# Altium PCB Follow Line Robot Controller PCB.PcbDoc
Units mil, origin at the board's own origin, x right, y up, seen from the top; angles counter-clockwise.
Board outline 4205 x 4745 mil, 2 copper layers (Top Layer, Bottom Layer); 17 components, 25 nets, 107 pads, 4 vias.
Unrouted connection lines stored in the file: 1.
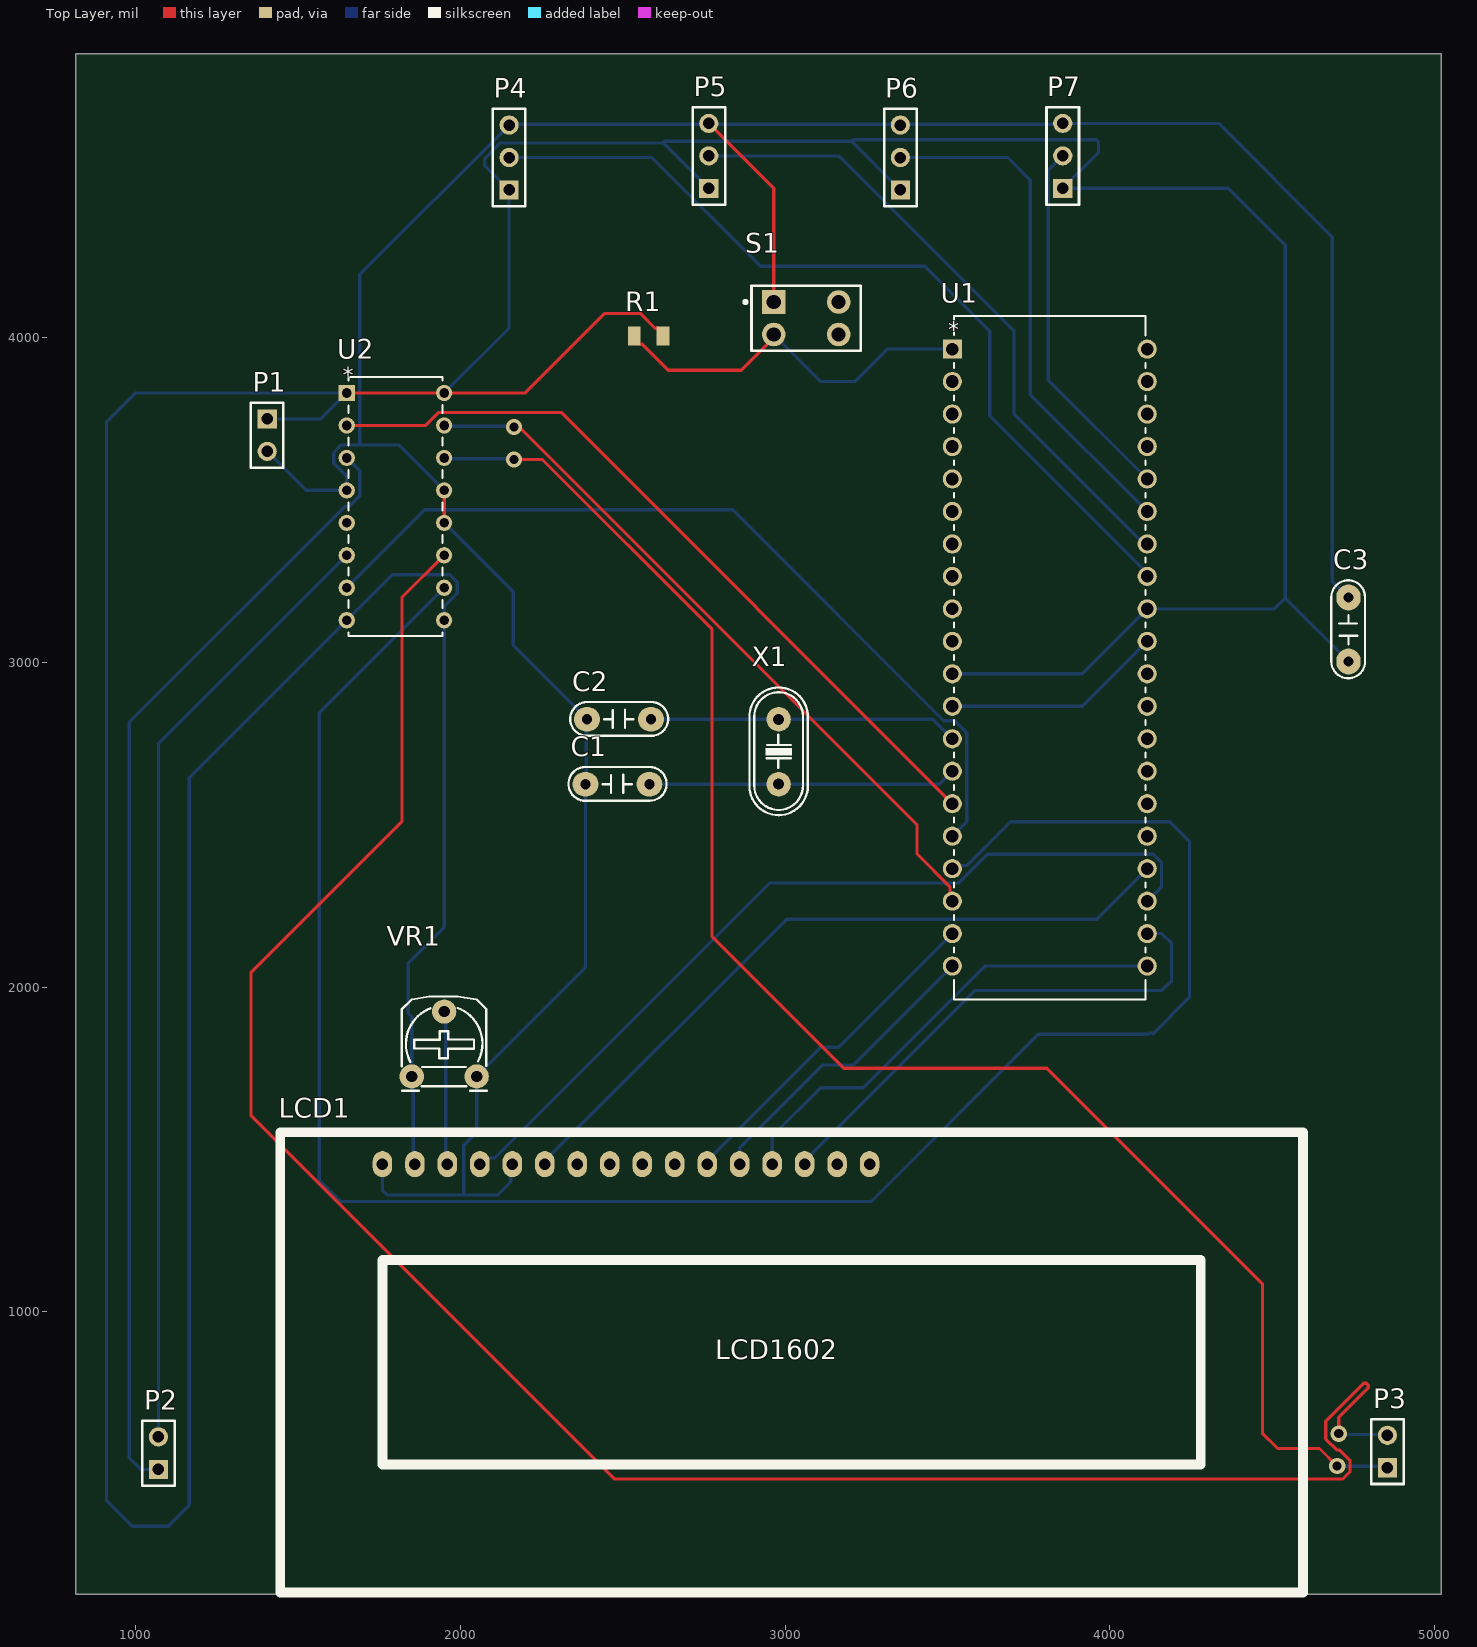
[diagram p0: Top Layer view]
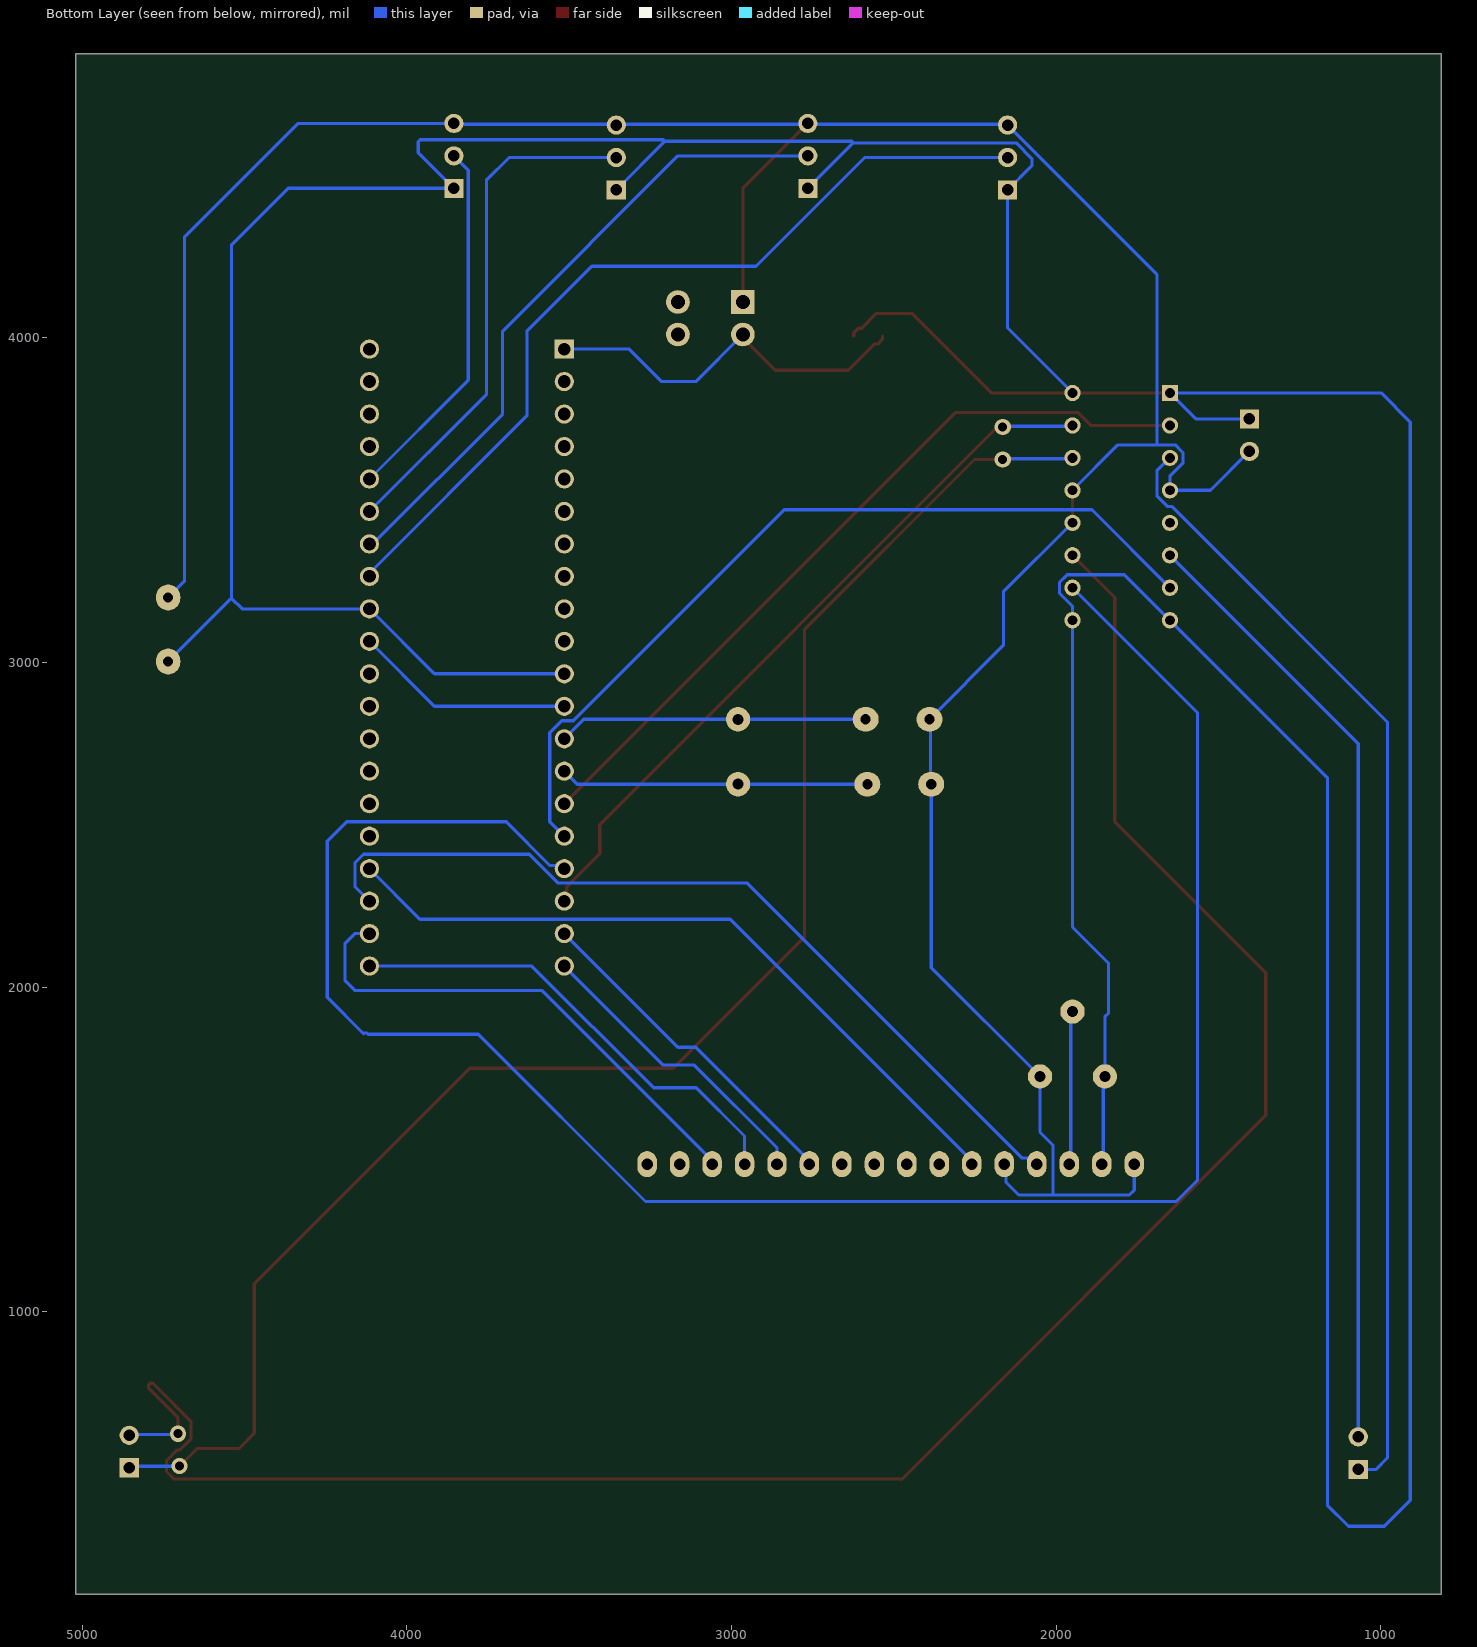
[diagram p1: Bottom Layer view, seen from below]
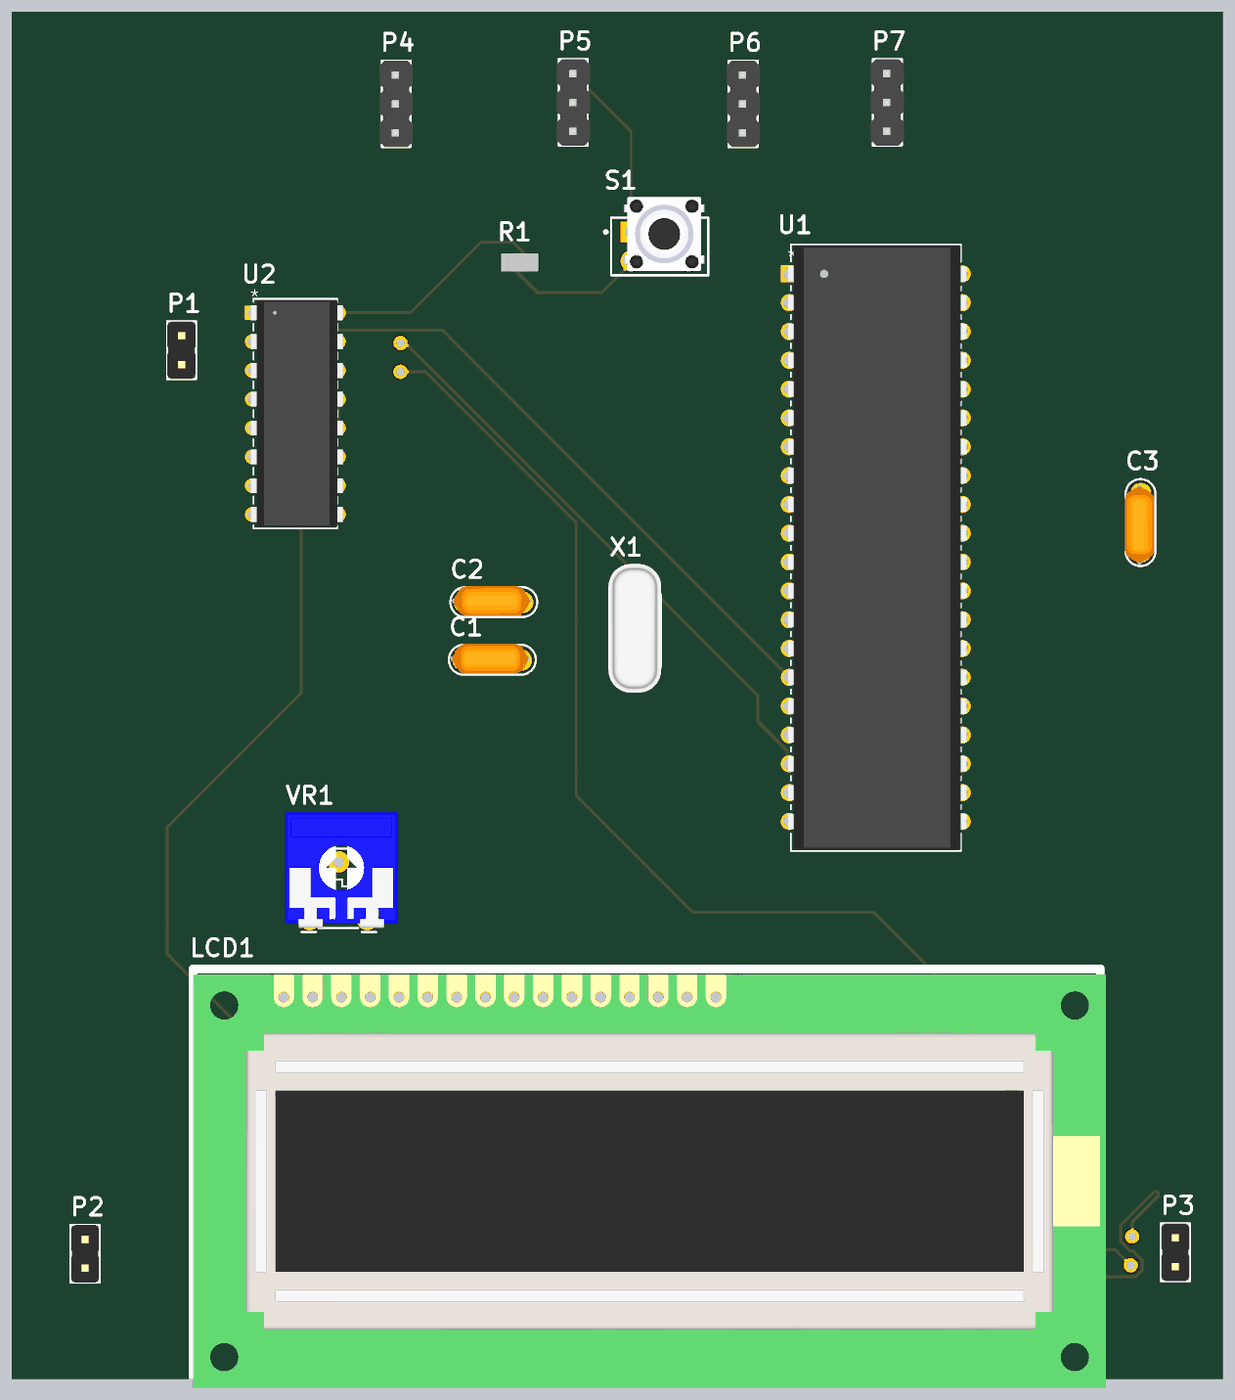
[diagram p2: 3D render of the assembled board from above, using the file's embedded part models]

## Layer stack, top to bottom
Top Solder: solder mask 0.4, Solder Resist, Dk 3.5
Top Layer: signal copper 1.4
Dielectric 1: dielectric 12.6, FR-4, Dk 4.8
Bottom Layer: signal copper 1.4
Bottom Solder: solder mask 0.4, Solder Resist, Dk 3.5

## Board outline
815,130 5020,130 5020,4875 815,4875

## Design rules (kind name [scope] priority, off if disabled: settings)
Clearance [All] p1: gap=10 ignorepadtopadclearanceinfootprint=FALSE except(0: Arc-Hole Track-Hole SMDPad-Hole THPad-Hole Via-Hole Fill-Hole Poly-Hole Region-Hole Text-Hole)
PolygonConnect [All] p1: connectstyle=Relief reliefconductorwidth=10 reliefentries=4 polygonreliefangle="90 Angle" airgapwidth=10
RoutingVias [All] p1: holewidth=28 width=50 viastyle="Through Hole" minholewidth=28 minwidth=50 maxholewidth=28 maxwidth=50
SolderMaskExpansion [All] p1: expansion=4 istentingtop=FALSE
Width [All] p1: maxlimit=10 minlimit=10 preferedwidth=10
30 further rules are at their usual default settings.

## Classes and differential pairs
component class "Follow Line Robot Controller Shematic": C1 C2 C3 LCD1 P1 P2 P3 P4 P5 P6 P7 R1 S1 U2 VR1 X1

## Components (designator, comment, footprint, x,y, rotation, side; value= is the part's Value field where it differs from the comment)
C1 "Cap Cer" CN3 2581.85,2625 r180 top value=22pF
C2 "Cap Cer" CN3 2586.85,2825 r180 top value=22pF
C3 "Cap Cer" CN3 4735,3200 r270 top value=100nF
LCD1 "LCD1602" LCD1602 1760,1455 r0 top
P1 "Vin" HDR1X2 1405,3750 r270 top
P2 "Left Motor" HDR1X2 1070,515 r90 top
P3 "Right Motor" HDR1X2 4855,520 r90 top
P4 "Far Left IR" HDR1X3 2150,4455 r90 top
P5 "Left IR" HDR1X3 2765,4460 r90 top
P6 "Right IR" HDR1X3 3355,4455 r90 top
P7 "Far Right IR" HDR1X3 3855,4460 r90 top
R1 "RESET" "SMD R1206" 2555,4005 r0 top value=10K
S1 "SW-DPST" DPST-4 3065,4060 r0 top
U1 "PIC18F4520-E/P" PDIP40_600MC_MCH 3515,3965 r0 top
U2 "L293D" PowerDIP-16_STM 1650,3830 r0 top
VR1 "10K" VR 1850,1725 r0 top value="VR 10K"
X1 "4Mhz" XT2 2980,2725 r270 top

## Footprints (in the part's own frame and the unit in brackets; to place one, negate y for a bottom-side part, rotate by r counter-clockwise, add the part's x,y. Pads: shape width x height; smd on the part's side, far side on the other; paste and mask are expansions set on the pad)
CN3 [mil]
  oval 80x75 hole 31: 1(0,0) 2(196.85,0)
  silkscreen extent -53,-53 249,51, body extent -34,-56 244,46, height 360
DPST-4 [mm]
  rect 1.85x1.85 hole 1.1: 1(-2.54,1.27)
  round 1.85 hole 1.1: 2(-2.54,-1.27) 3(2.54,-1.27) 4(2.54,1.27)
  silkscreen extent -4.88,-2.54 4.28,2.54, body extent -3.73,-2.15 4.53,4.35, height 5
HDR1X2 [mm]
  rect 1.5x1.5 hole 0.9: 1(0,0)
  round 1.5 hole 0.9: 2(2.54,0)
  silkscreen extent -1.27,-1.27 3.81,1.27, body extent -1.27,-1.24 3.81,1.25, height 8.54
HDR1X3 [mm]
  rect 1.5x1.5 hole 0.9: 1(0,0)
  round 1.5 hole 0.9: 2(2.54,0) 3(5.08,0)
  silkscreen extent -1.27,-1.27 6.35,1.27, body extent -1.27,-1.46 6.35,1.46, height 8.51
LCD1602 [mil]
  oval 60x80 hole 35.43: 1(0,0) 2(100,0) 3(200,0) 4(300,0) 5(400,0) 6(500,0) 7(600,0) 8(700,0) 9(800,0) 10(900,0) 11(1000,0) 12(1100,0) 13(1200,0) 14(1300,0) 15(1400,0) 16(1500,0)
  silkscreen extent -315,-1319 2835,98, body extent -315,-1357 2854,80, height 414
PDIP40_600MC_MCH [mil]
  rect 59x59 hole 39 mask+0: 1(0,0)
  round 59 hole 39 mask+0: 2(0,-100) 3(0,-200) 4(0,-300) 5(0,-400) 6(0,-500) 7(0,-600) 8(0,-700) 9(0,-800) 10(0,-900) 11(0,-1000) 12(0,-1100) 13(0,-1200) 14(0,-1300) 15(0,-1400) 16(0,-1500) 17(0,-1600) 18(0,-1700) 19(0,-1800) 20(0,-1900) 21(600,-1900) 22(600,-1800) 23(600,-1700) 24(600,-1600) 25(600,-1500) 26(600,-1400) 27(600,-1300) 28(600,-1200) 29(600,-1100) 30(600,-1000) 31(600,-900) 32(600,-800) 33(600,-700) 34(600,-600) 35(600,-500) 36(600,-400) 37(600,-300) 38(600,-200) 39(600,-100) 40(600,0)
  silkscreen extent 5,-2002 595,102, body extent -5,-1997 615,97, height 255
PowerDIP-16_STM [mil]
  rect 50x50 hole 30 mask+0: 1(0,0)
  round 50 hole 30 mask+0: 2(0,-100) 3(0,-200) 4(0,-300) 5(0,-400) 6(0,-500) 7(0,-600) 8(0,-700) 9(300,-700) 10(300,-600) 11(300,-500) 12(300,-400) 13(300,-300) 14(300,-200) 15(300,-100) 16(300,0)
  silkscreen extent 5,-748 295,48, body extent -5,-744 315,44, height 206
"SMD R1206" [mm]
  rect 1x1.5 smd: 1(-0.5,0) 2(1.75,0)
  body extent -1.02,-0.8 2.18,0.8, height 0.6
VR [mil]
  round 75 hole 35: 1(0,0) 2(100,200) 3(200,0)
  silkscreen extent -31,-44 231,246, body extent -87,-30 307,372, height 165
XT2 [mil]
  round 75 hole 34: 1(-100,0) 2(100,0)
  silkscreen extent -198,-90 195,90, body extent -233,-93 213,90, height 138

## Part data
C1 C2 C3: library part CN3, "Cap np W0.3"
P1 P2 P3: library part "Header 2", "Header, 2-Pin", LatestRevisionDate=17-Jul-2002, LatestRevisionNote="Re-released for DXP Platform.", Publisher="Altium Limited"
P4 P5 P6 P7: library part "Header 3", "Header, 3-Pin", LatestRevisionDate=17-Jul-2002, LatestRevisionNote="Re-released for DXP Platform.", Publisher="Altium Limited"
R1: library part Res2_1, "Resistor", LatestRevisionDate=17-Jul-2002, LatestRevisionNote="Re-released for DXP Platform.", PackageDescription="Axial Device, Thru-Hole; 2 Leads; 0.4 in Pin Spacing", PackageReference=AXIAL-0.4, Published=8-Jun-2000, Publisher="Altium Limited"
S1: "Double-Pole, Single-Throw Switch", LatestRevisionDate=17-Jul-2002, LatestRevisionNote="Re-released for DXP Platform.", PackageDescription="Switch; 4 Leads", PackageReference=DPST-4, Published=24-Mar-1999, Publisher="Altium Limited"
U1: "No Description Available", Mfr_Name=Microchip, Copyright="Copyright (C) 2022 Ultra Librarian. All rights reserved.", Manufacturer_Part_Number=PIC18F4520-E/P, RefDes=RefDes, Type=DEV
U2: "No Description Available", Mfr_Name=STMicroelectronics, Copyright="Copyright (C) 2022 Ultra Librarian. All rights reserved.", Manufacturer_Part_Number=L293D, RefDes=RefDes, Type=DEV
VR1: library part VR1, "Var Resistor"
X1: library part XT2, "Crystal For all Crystal 2pin."

## Via types
v1: diameter 50, hole 28, Top Layer to Bottom Layer, 4 vias

## Nets (pads, with @x,y where several pads share a name; then routed paths per layer and width w, separated by ;. In a path a pad name is that pad's centre, name@x,y a point inside that pad or via, vN(x,y) a via of type N, cw(c..) or ccw(c..) an arc to the next point about the centre after c; other vN are vias at no path point)
GND: C1.2 C2.2 C3.1 LCD1.1 LCD1.5 P1.2 P4.3 P5.3 P6.3 P7.3 S1.1 U2.4 U2.5 U2.12 U2.13 VR1.3 | length 9544
  Top Layer w10: U2.12 U2.13 ; P5.3 2965,4460 S1.1
  Bottom Layer w10: P1.2 1525,3530 U2.4 1650,3573.43 1610,3613.43 1610,3646.57 1633.43,3670 1690,3670 ; LCD1.1 1760,1375 1775,1360 2010,1360 ; U2.12 2162.59,3217.41 2162.59,3052.41 C2.2 2387.5,2822.5 2387.5,2627.5 C1.2 2385,2060 VR1.3 2050,1553.71 2010,1513.71 2010,1360 ; U2.13@1952.5,3527.5 U2.13 1810,3670 1690,3670 ; LCD1.5@2165.74,1449.26 LCD1.5 2155,1450 2155,1400 2115,1360 2010,1360 ; C3.1@4740,3195 4685,3250 4685,4310 4335,4660 P7.3 3852.5,4657.5 3357.5,4657.5 P6.3 3352.5,4657.5 2767.5,4657.5 P5.3 2762.5,4657.5 2152.5,4657.5 P4.3 1690,4195 1690,3670
Input1: U1.15 U2.2 | length 2380.7
  Top Layer w10: U2.2 1893.43,3730 1933.43,3770 2310,3770 U1.15
Input2: U1.16 U2.7 | length 2630.2
  Bottom Layer w10: U2.7 1890,3470 2838.28,3470 3487.78,2820.5 3522.43,2820.5 3559.5,2783.43 3559.5,2509.5 U1.16
Input3: U1.17 U2.10 | length 6248.6
  Bottom Layer w10: U2.10 1565,2845 1565,1405.86 1630.86,1340 3265,1340 3780,1855 4119.14,1855 4122.93,1858.79 4131.21,1858.79 4133.36,1856.64 4245,1968.28 4245,2449.14 4184.64,2509.5 3694.15,2509.5 3559.02,2374.38 3524.38,2374.38 U1.17
Input4: U1.18 U2.15 | length 2246
  Top Layer w10: v1(2165,3725) 2172.65,3717.35 2189.22,3717.35 3406.1,2500.47 3406.1,2410.97 3507.57,2309.5 3507.57,2272.43 U1.18
  Bottom Layer w10: U2.15 1952.5,3727.5 2162.5,3727.5 v1(2165,3725)
IRSensor1: P4.2 U1.33 | length 2657.5
  Bottom Layer w10: P4.2 2589.73,4555 2924.73,4220 3430,4220 3630,4020 3630,3760 4115,3275 U1.33
IRSensor2: P5.2 U1.34 | length 1994.4
  Bottom Layer w10: P5.2 3165,4560 3705,4020 3705,3765 4105,3365 U1.34
IRSensor3: P6.2 U1.35 | length 1598.1
  Bottom Layer w10: P6.2 3685,4555 3755,4485 3755,3825 U1.35
IRSensor4: P7.2 U1.36 | length 1139.6
  Bottom Layer w10: P7.2 3810.47,4515.47 3810.47,3869.53 U1.36
NetLCD1_3: LCD1.3 VR1.2 | length 474.1
  Bottom Layer w10: VR1.2 1955,1920 1955,1460 LCD1.3
OSC1: C2.1 U1.13 X1.1 | length 953
  Bottom Layer w10: C2.1 X1.1 3455,2825 U1.13
OSC2: C1.1 U1.14 X1.2 | length 949.7
  Bottom Layer w10: C1.1 X1.2 3475,2625 U1.14
Output1: P2.1 U2.3 | length 3502.9
  Bottom Layer w10: P2.1 1015,515 980,550 980,2816.57 1643.43,3480 1656.57,3480 1690,3513.43 1690,3590 U2.3
Output2: P2.2 U2.6 | length 2955.2
  Bottom Layer w10: P2.2 1070,2750 U2.6
Output3: P3.1 U2.14 | length 5018.5
  Top Layer w10: v1(2165,3625) 2251.72,3625 2775,3101.72 2775,2155 3180,1750 3805,1750 3805.86,1750.86 4470,1086.72 4470,625.86 4516.6,579.26 4645.74,579.26 v1(4700,525)
  Bottom Layer w10: U2.14 1952.5,3627.5 2162.5,3627.5 v1(2165,3625) ; v1(4700,525) 4850,525 P3.1
Output4: P3.2 U2.11 | length 6541.2
  Top Layer w10: U2.11 1820,3200 1820,2510 1355,2045 1355,1605 2475,485 4716.57,485 4740,508.43 4740,541.57 4706.57,575 4698.43,575 4665,608.43 4665,663.28 4781.72,780 4790,780 4795.86,774.14 4795.86,765.86 4705,675 v1(4705,625)
  Bottom Layer w10: v1(4705,625) 4707.5,622.5 4852.5,622.5 P3.2
RD0: LCD1.11 U1.19 | length 1054.9
  Bottom Layer w10: LCD1.11 2760,1465 3110.1,1815.1 3165.1,1815.1 U1.19
RD1: LCD1.12 U1.20 | length 937
  Bottom Layer w10: LCD1.12 2860,1505 3115,1760 3210,1760 U1.20
RD2: LCD1.13 U1.21 | length 1459.2
  Bottom Layer w10: LCD1.13 2960,1541.72 3109.14,1690.86 3110,1690 3240,1690 3615,2065 U1.21
RD3: LCD1.14 U1.22 | length 1572.3
  Bottom Layer w10: LCD1.14 3060,1465 3585,1990 4160,1990 4190,2020 4190,2135 4160,2165 U1.22
RD4: LCD1.4 U1.23 | length 2642.5
  Bottom Layer w10: LCD1.4 2078.64,1473.64 2105,1473.64 2951.86,2320.5 3533.43,2320.5 3622.43,2409.5 4133.43,2409.5 4159.5,2383.43 4159.5,2309.5 U1.23
RD5: LCD1.6 U1.24 | length 2237.8
  Bottom Layer w10: LCD1.6 2260,1465 3004.5,2209.5 3959.5,2209.5 U1.24
Reset1: R1.1 S1.2 U1.1 | length 1181.8
  Top Layer w10: R1.1 2535.32,3995.16 2550,3980.47 2559.84,3980.47 2640.32,3900 2865,3900 2965,4000 S1.2
  Bottom Layer w10: S1.2 3110,3865 3215,3865 3315,3965 U1.1
VDD1: C3.2 LCD1.2 P1.1 P4.1 P5.1 P6.1 P7.1 R1.2 U1.11 U1.32 U2.1 U2.8 U2.9 U2.16 VR1.1 | length 17593.4
  Top Layer w10: U2.1 U2.16 2200,3830 2445,4075 2553.9,4075 2599.37,4029.53 2609.21,4029.53 2623.9,4014.84 R1.2 ; C3.2@4733.15,3005 C3.2
  Bottom Layer w10: P1.1 1570,3750 U2.1 999.67,3830 910,3740.33 910,420 990,340 1100,340 1165,405 1165,2645 U2.8 1790,3270 1966.57,3270 1990,3246.57 1990,3213.43 1950,3173.43 U2.9 1950,2185 1839.14,2074.14 1839.14,1920.01 1850,1909.16 VR1.1 1855,1720 1855,1460 LCD1.2 ; U2.16 2150,4030 P4.1 2075,4530 2075,4551.72 2123.28,4600 2625,4600 ; P5.1 2625,4600 ; P6.1 3205,4605 ; U1.11 3915,2965 U1.32 4506.85,3165 4540,3198.15 ; C3.2 4540,3198.15 ; 2625,4600 2630,4605 3205,4605 ; 3205,4605 3210,4610 3959.14,4610 3965,4604.14 3965,4570 P7.1 4365,4460 4540,4285 4540,3198.15
VSS1: U1.12 U1.31 | length 696.1
  Bottom Layer w10: U1.12 3915,2865 U1.31 U1.31@4105.62,3074.38
pads on no net: LCD1.7 LCD1.8 LCD1.9 LCD1.10 LCD1.15 LCD1.16 S1.3 S1.4 U1.2 U1.3 U1.4 U1.5 U1.6 U1.7 U1.8 U1.9 U1.10 U1.25 U1.26 U1.27 U1.28 U1.29 U1.30 U1.37 U1.38 U1.39 U1.40

## Text inside footprints (layer, text, board x,y; h text height)
U1: Top Overlay "*" at 3502.5,3999.5 h50; Mechanical 13 "*" at 3522.5,3940 h50
U2: Top Overlay "*" at 1637.5,3860 h50; Mechanical 13 "*" at 1657.5,3805 h50